# Altium PCB BopIT.PcbDoc
Units mil, origin at the board's own origin, x right, y up, seen from the top; angles counter-clockwise.
Board outline 3149.61 x 2992.13 mil, 2 copper layers (Top Layer, Bottom Layer); 13 components, 19 nets, 53 pads, 39 vias.
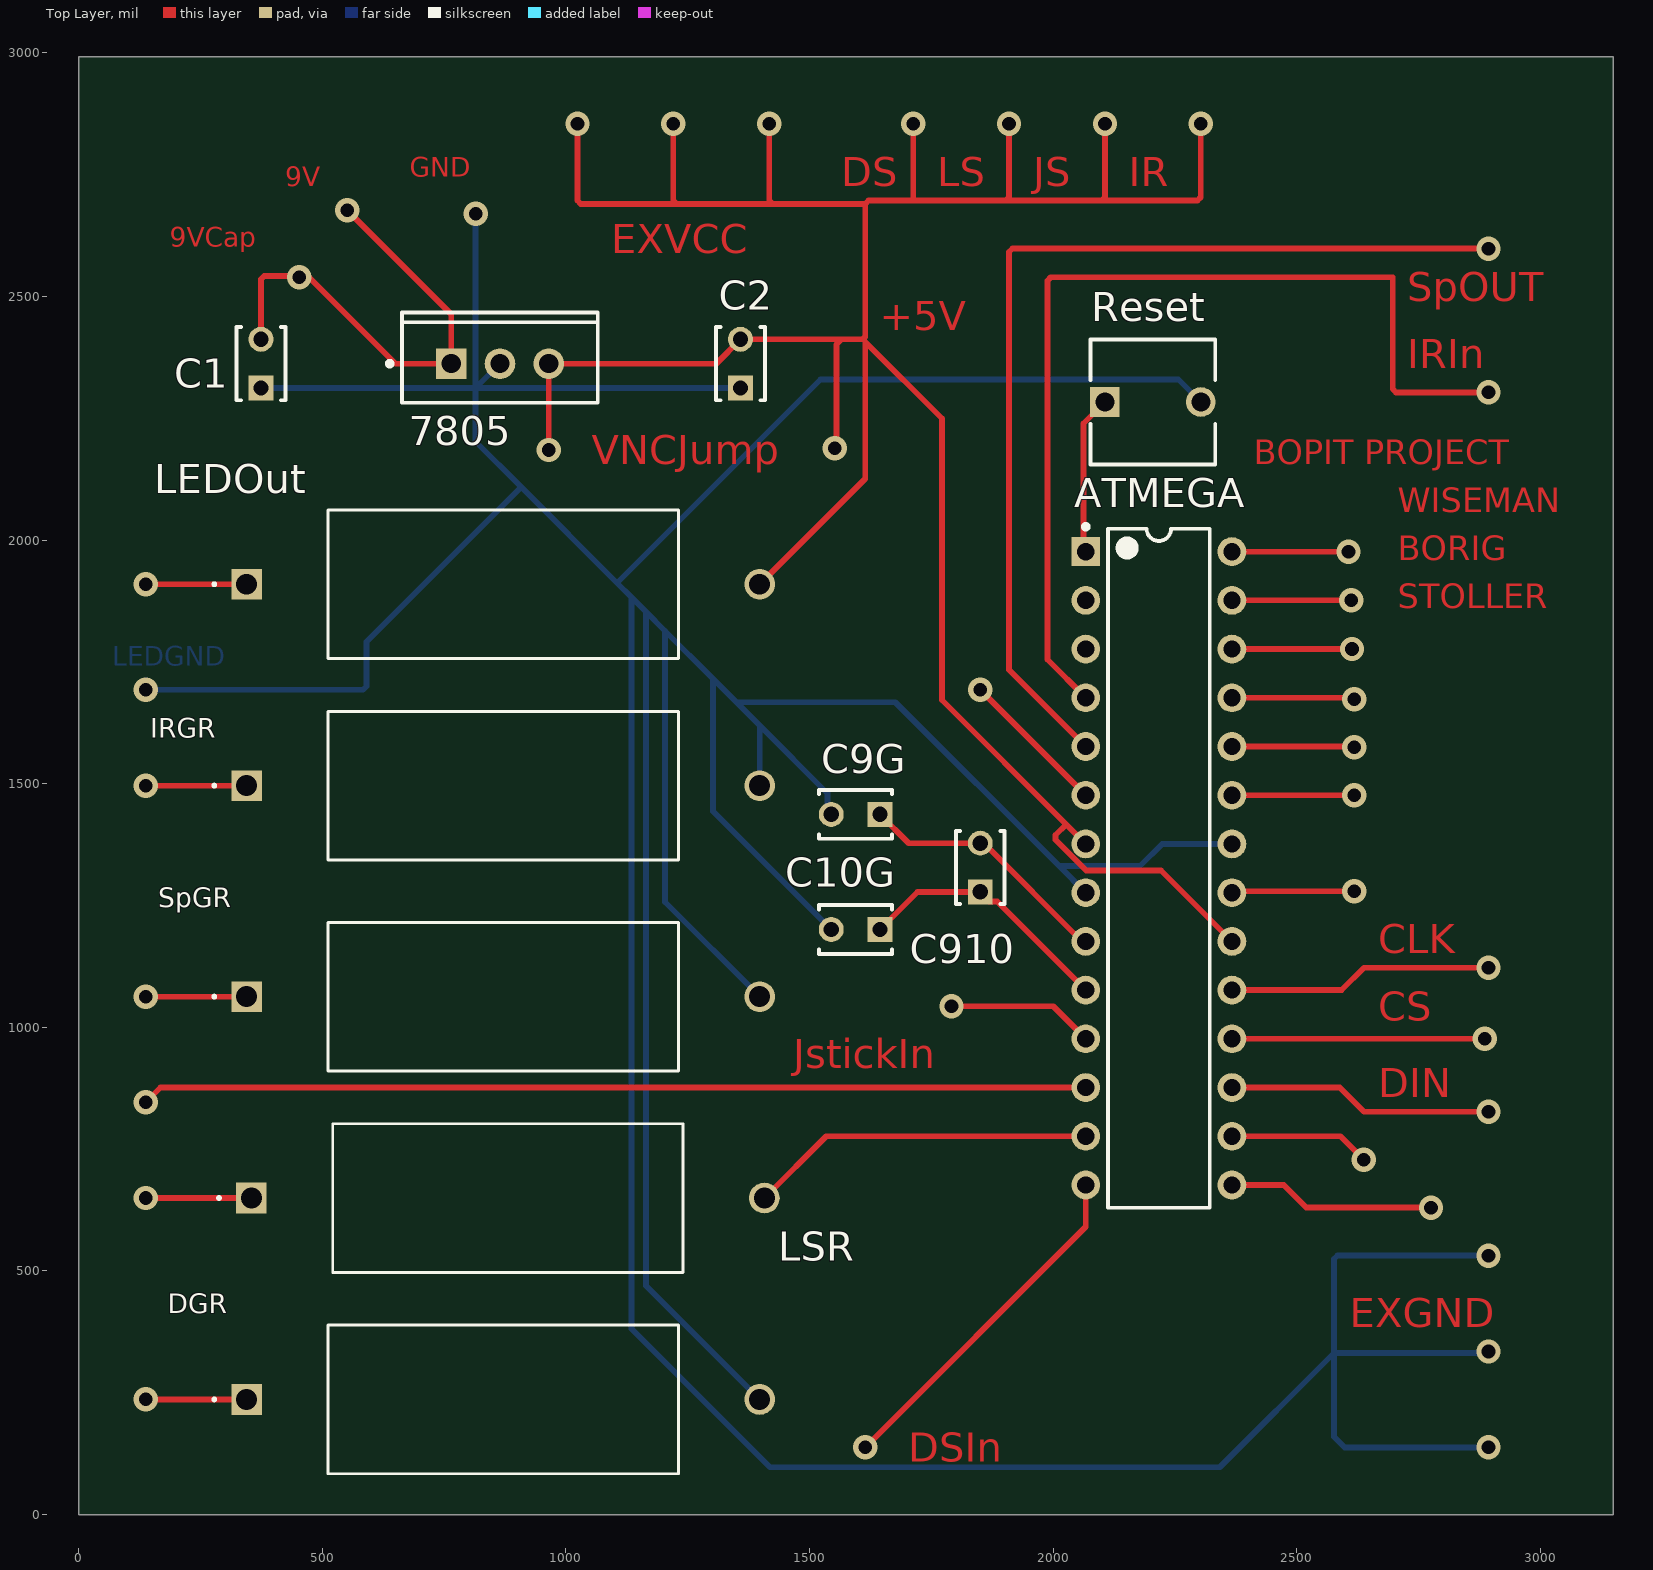
[diagram p0: Top Layer view]
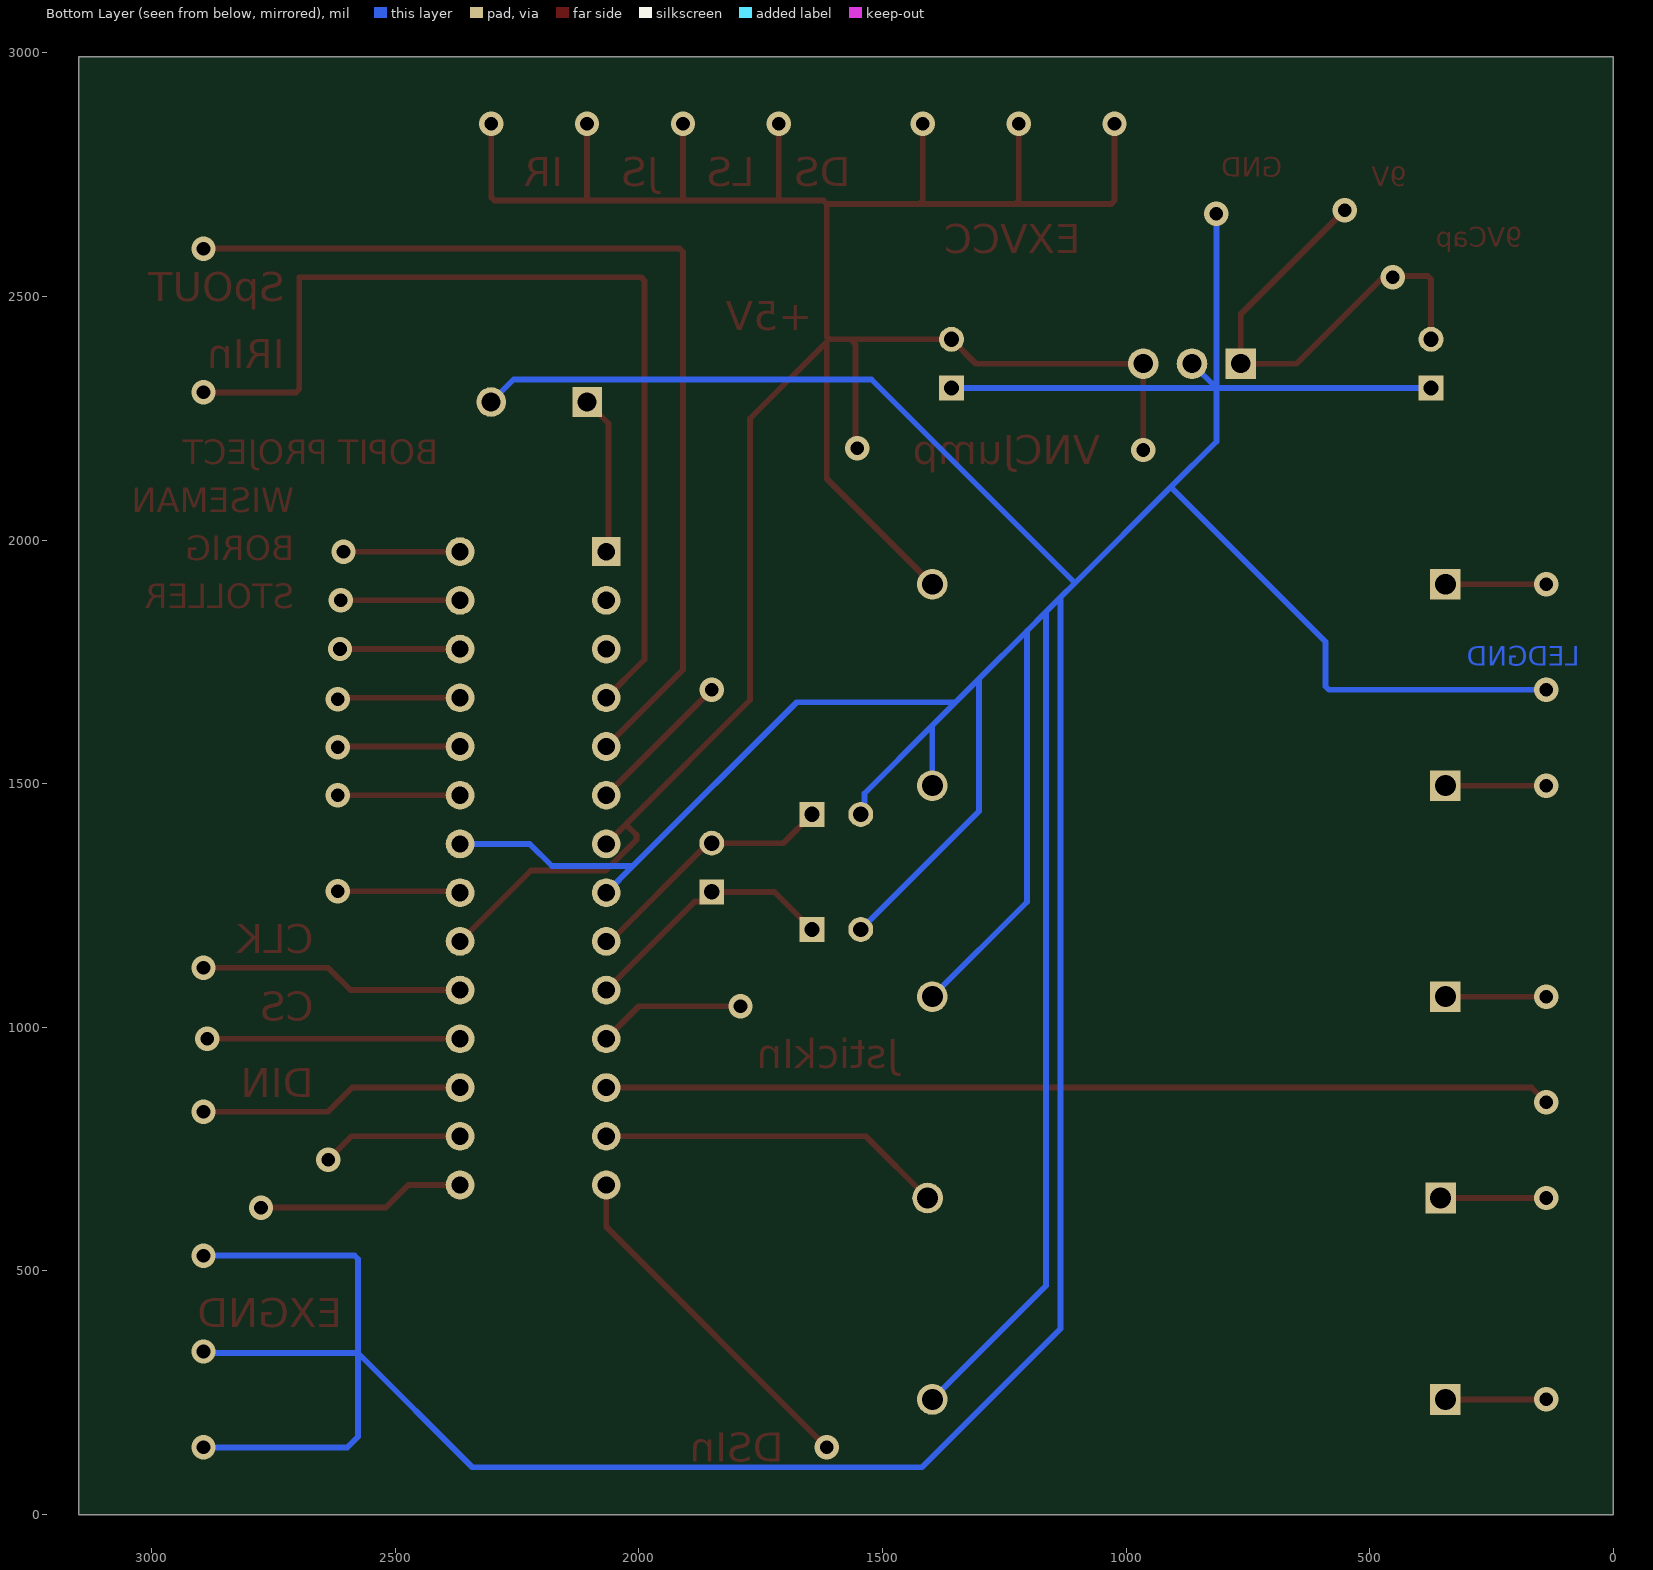
[diagram p1: Bottom Layer view, seen from below]

## Layer stack, top to bottom
Top Solder: solder mask 0.4, Solder Resist, Dk 3.5
Top Layer: signal copper 1.4
Dielectric 1: dielectric 12.6, FR-4, Dk 4.8
Bottom Layer: signal copper 1.4
Bottom Solder: solder mask 0.4, Solder Resist, Dk 3.5

## Board outline
0,0 3149.61,0 3149.61,2992.13 0,2992.13

## Design rules (kind name [scope] priority, off if disabled: settings)
Clearance [All] p1: gap=10 ignorepadtopadclearanceinfootprint=FALSE except(0: Arc-Hole Track-Hole SMDPad-Hole THPad-Hole Via-Hole Fill-Hole Poly-Hole Region-Hole Text-Hole)
PolygonConnect [All] p1: connectstyle=Relief reliefconductorwidth=10 reliefentries=4 polygonreliefangle="90 Angle" airgapwidth=10
RoutingVias [All] p1: holewidth=28 width=50 viastyle="Through Hole" minholewidth=28 minwidth=50 maxholewidth=28 maxwidth=50
SolderMaskExpansion [All] p1: expansion=4 istentingtop=FALSE
Width [All] p1: maxlimit=19.68 minlimit=10 preferedwidth=15.75
30 further rules are at their usual default settings.

## Components (designator, comment, footprint, x,y, rotation, side; value= is the part's Value field where it differs from the comment)
7805 "LM7805ACT" FAIR-TO-220-3 864.57,2362.2 r90 top
ATMEGA "ATmega328-PU" 28P3 2216.93,1326.38 r0 top
C1 "10uF" KEMT-C315-THT-2 374.02,2362.2 r90 top
C2 "1uF" KEMT-C315-THT-2 1358.27,2362.2 r90 top
C9G "1uF" KEMT-C315-THT-2 1594.49,1437.01 r180 top
C10G "1uF" KEMT-C315-THT-2 1594.49,1200.79 r180 top
C910 "C315C100J2G5TA" KEMT-C315-THT-2 1850.39,1327.95 r90 top
DGR "AC05000001001JAC00" RES_AC05_VIS 344.64,236.22 r0 top
IRGR "AC05000001001JAC00" RES_AC05_VIS 344.64,1496.06 r0 top
LEDOut "AC05000001001JAC00" RES_AC05_VIS 344.64,1909.45 r0 top (schematic designator LEDOR)
LSR "AC05000001001JAC00" RES_AC05_VIS 354.33,649.61 r0 top (schematic designator LIR)
Reset "FSM4JRT" FP-FSM4JRT-MFG 2204.72,2283.46 r0 top
SpGR "AC05000001001JAC00" RES_AC05_VIS 344.64,1062.99 r0 top

## Footprints (in the part's own frame and the unit in brackets; to place one, negate y for a bottom-side part, rotate by r counter-clockwise, add the part's x,y. Pads: shape width x height; smd on the part's side, far side on the other; paste and mask are expansions set on the pad)
28P3 [mm] "28-Pin Plastic Dual In-Line Package (PDIP)"
  rect 1.5x1.5 hole 0.9: 1(-3.81,16.51)
  round 1.5 hole 0.9: 2(-3.81,13.97) 3(-3.81,11.43) 4(-3.81,8.89) 5(-3.81,6.35) 6(-3.81,3.81) 7(-3.81,1.27) 8(-3.81,-1.27) 9(-3.81,-3.81) 10(-3.81,-6.35) 11(-3.81,-8.89) 12(-3.81,-11.43) 13(-3.81,-13.97) 14(-3.81,-16.51) 15(3.81,-16.51) 16(3.81,-13.97) 17(3.81,-11.43) 18(3.81,-8.89) 19(3.81,-6.35) 20(3.81,-3.81) 21(3.81,-1.27) 22(3.81,1.27) 23(3.81,3.81) 24(3.81,6.35) 25(3.81,8.89) 26(3.81,11.43) 27(3.81,13.97) 28(3.81,16.51)
  silkscreen extent -3.93,-17.7 2.65,17.93, body extent -3.6,-17.65 3.6,17.65, height 4.58
FAIR-TO-220-3 [mm] "FM, 3-Leads, Body 10.2x4.7mm, Pitch 2.54mm"
  rect 1.6x1.6 hole 1: 1(0,2.54)
  round 1.6 hole 1: 2(0,0) 3(0,-2.54)
  silkscreen extent -2.04,-5.1 2.66,5.87, body extent -2.04,-5.1 2.66,5.1, height 18.95
FP-FSM4JRT-MFG [mil]
  rect 60.65x60.65 hole 39 paste-39370.1 mask+0: 1(-98.5,0)
  round 60.65 hole 39 paste-39370.1 mask+0: 2(98.5,0)
  silkscreen extent -128,-128 128,128, body extent -133,-132 133,132, height 10
KEMT-C315-THT-2 [mm] "THD, 2-Leads, Body 3.81x2.54mm"
  rect 1.3x1.3 hole 0.8: 1(-1.27,0)
  round 1.3 hole 0.8: 2(1.27,0)
  silkscreen extent -1.91,-1.27 1.91,1.27, body extent -1.91,-1.27 1.91,1.27, height 4.66
RES_AC05_VIS [mil]
  rect 63x63 / inner round 60 / far side rect 63x63 hole 43 paste-31.5 mask+0: 1(0,0)
  round 63 / inner round 60 / far side round 63 hole 43 paste-31.5 mask+0: 2(1053,0)
  silkscreen extent -69,-152 886,152, body extent -16,-147 1069,147, height 295

## Part data
7805: library part CMP-2000-04937-1, "Positive Voltage Regulator, 5 V, 1 A, 0 to 125 degC, 3-Pin TO-220, RoHS, Tube", Dropout Voltage Measurement Current=1A, Manufacturer=Fairchild, Maximum Input Voltage=35V, Maximum Operating Temperature=+125degC, Minimum Operating Temperature=0degC, Output Voltage=5V, Package Description="3-Pin Through Hole Device, Body 10 x 4.5 mm, Pitch 2.54 mm", Package Reference=TO-220, Quiescent Current=6mA, Typical Dropout Voltage @ Current=2V@1A, Datasheet URL=https://datasheet.ciiva.com/5816/1359194-5816420.pdf, Datasheet Version="Rev. 1.0.1, 05/2006", Dimensions=10.67x4.83x16.51mm, Height=16.51mm, Length=10.67mm, Line Regulation=50mV, Load Regulation=100mV, Manufacturer URL=https://www.fairchildsemi.com/, Maximum Output Current=1A, Mounting Type=ThroughHole, Number of Outputs=1, Output Type=Fixed, Package Type=TO-220, Package URL=https://www.fairchildsemi.com/package-drawings/TO/TO220B03.pdf, Pin Count=3, Polarity=Positive, Regulator Function=Linear, Series=LM78xx, Width=4.83mm
ATMEGA: library part CMP-0095-00015-2, "8-bit AVR Microcontroller, 32KB Flash, 1KB EEPROM, 2KB SRAM, 28-pin PDIP, Industrial Grade (-40°C to 85°C)", ComponentLink1Description="Manufacturer URL", ComponentLink1URL=http://www.atmel.com/, ComponentLink2Description="ATmega48A/48PA/88A/88PA/168A/168PA/328/328P Datasheet", ComponentLink2URL=http://www.atmel.com/dyn/resources/prod_documents/8271.pdf, ComponentLink3Description="ATmega48A/48PA/88A/88PA/168A/168PA/328/328P Summary", ComponentLink3URL=http://www.atmel.com/dyn/resources/prod_documents/8271S.pdf, DatasheetVersion="revD, May-2011", PackageDescription="28-lead (0.300\"/7.62mm Wide) Plastic Dual Inline Package (PDIP)", PackageReference=28P3, PackageVersion="revB, Sep-2001", RevisionNote="DatasheetVersion updated. URLs added."
C1 C2 C9G C10G C910: library part CMP-1664-00009-1, "Capacitor, Ceramic, 10 pF, +/-5 %, 200 V, 2-Pin THD, RoHS, Bulk", Case\Package=DIP, Max Dual Supply Voltage="16 V", Max Operating Temperature="70 degC", Min Dual Supply Voltage="1.5 V", Min Operating Temperature="0 degC", Nominal Supply Current="1.2 mA", Nominal Supply Voltage="5 V", Nominal Voltage Gain="100 dB", Output Current="30 mA", Package Quantity=50, Bandwidth="700 KHz", Channels=2, Common Mode Rejection Ratio="65 dB", ComponentLink1Description="Manufacturer URL", ComponentLink1URL=http://www.kemet.com/, ComponentLink2Description=Datasheet, ComponentLink2URL=http://capacitoredge.kemet.com/capedge2/DataSheet/Datasheet-C315C100J2G5TA.pdf?pn=C315C100J2G5TA{BULK}, DatasheetVersion=Aug-16, Max Supply Voltage="16 V", Min Supply Voltage="1.5 V", Mount="Through Hole", Nominal Gain Bandwith Product="700 KHz", PackageDescription="2-Pin Through Hole Device, Body 3.81 x 2.54 mm", PackageReference=C315-THT-2, Packaging=Rail/Tube, Pins=8, Radiation Hardening=No, REACH SVHC="No SVHC", RoHSCompliant=true, Slew Rate="0.3 V\us", Unity Gain Bandwidth Product="700 KHz"
DGR IRGR LEDOut LSR SpGR: library part CMP-00030-39746222-1, "AC05000001001JAC00 Resistor, Wirewound, Res 1 Kilohms, Pwr-Rtg 5 W, Tol 5%, Axial, Ceramic Core", Case/Package=Conformal, Max Operating Temperature=275°C, Max Power Dissipation=5W, Min Operating Temperature=0°C, Resistance=1kΩ, Temperature Coefficient=180ppm/°C, Tolerance=5%, Voltage Rating=71V, Composition=Wirewound, Contact Plating=Tin, Diameter=7.5mm, Features="Flame Retardant Coating", Lead Diameter=800µm, Lead Free="Lead Free", Length=18mm, Military Standard=Not, Mount="Through Hole", NexarPartId=39746222, Number of Pins=2, Number of Terminations=2, Packaging="Tape & Box (TB)", Power Rating=5W, Radiation Hardening=No, REACH SVHC=Unknown, RoHS=Compliant, Schedule B="8533210080, 8533210080", Termination=Axial, Voltage Rating (DC)=71V, Width=7.49mm
Reset: library part CMP-03407-000038-1, "SWITCH TACTILE SPST-NO 0.05A 24V", Case/Package=Radial, Contact Current Rating=50mA, Contact Resistance=100mR, Max Operating Temperature=105°C, Max Voltage Rating (DC)=12V, Min Operating Temperature=-35°C, Operating Force=1.57N, Package Quantity=10000, Actuator Diameter=3.5mm, Actuator Length=0.055inch, Actuator Material=Resin, Actuator Type=Standard, Contact Material="Copper Alloy", Contact Plating=Silver, Current Rating=50mA, Depth=6.19mm, Electrical Life=100000Cycles, Illumination Type=Non-Illuminated, Length=6.19mm, Max Current Rating=50mA, Mechanical Life=100000Cycles, Mount="Through Hole", Orientation=Straight, Packaging="Tape and Reel", Radiation Hardening=No, RoHS Compliant=Yes, Series=FSMJRT, Switch Function=Off-Mom, Switch Travel=0.25mm, Termination="PC Pins", Throw Configuration=SPST, Type=Switch, Voltage Rating (DC)=12V

## Via types
v1: diameter 50, hole 28, Top Layer to Bottom Layer, 39 vias

## Nets (pads, with @x,y where several pads share a name; then routed paths per layer and width w, separated by ;. In a path a pad name is that pad's centre, name@x,y a point inside that pad or via, vN(x,y) a via of type N, cw(c..) or ccw(c..) an arc to the next point about the centre after c; other vN are vias at no path point)
GND: 7805.2 ATMEGA.8 ATMEGA.22 C1.1 C2.1 C9G.2 C10G.2 DGR.2 IRGR.2 Reset.2 SpGR.2 | length 14010.5
  Top Layer w11.81: ATMEGA.22 ATMEGA.22@2368.5,1377.95
  Bottom Layer w11.81: v1@137.8,1712.6 157.48,1692.91 583.63,1692.91 590.55,1699.83 590.55,1791.34 908.19,2108.97 ; C1.1 814.57,2312.2 ; v1(814.57,2669.68) 814.57,2312.2 ; 7805.2 814.57,2312.2 ; C2.1 814.57,2312.2 ; DGR.2 1164.09,469.77 1164.09,1853.07 ; SpGR.2 1203.46,1257.17 1203.46,1813.7 ; IRGR.2 1397.64,1619.52 ; C10G.2 1301.89,1443.39 1301.89,1715.27 ; C9G.2 1536.96,1444.54 1536.96,1480.21 1397.64,1619.52 ; ATMEGA.8 2012.36,1330.94 ; Reset.2 2256.99,2329.7 1522.61,2329.7 1105.04,1912.12 ; ATMEGA.22 2223.84,1376.38 2178.41,1330.94 2012.36,1330.94 ; v1(2893.7,137.8) 2598.43,137.8 2576.61,159.61 2576.61,331.72 ; v1(2893.7,334.65) 2890.77,331.72 2576.61,331.72 ; v1(2893.7,531.5) 2583.53,531.5 2576.61,524.58 2576.61,331.72 ; 814.57,2312.2 814.57,2202.6 908.19,2108.97 ; 908.19,2108.97 1105.04,1912.12 ; 1105.04,1912.12 1134.57,1882.6 ; 1134.57,1882.6 1164.09,1853.07 ; 1134.57,1882.6 1134.57,381.18 1418.86,96.89 2341.79,96.89 2576.61,331.72 ; 1164.09,1853.07 1203.46,1813.7 ; 1203.46,1813.7 1301.89,1715.27 ; 1301.89,1715.27 1349.76,1667.4 ; 1349.76,1667.4 1397.64,1619.52 ; 1349.76,1667.4 1675.91,1667.4 2012.36,1330.94
  other v1: 137.8,1692.91
Net7805_3: 7805.3 ATMEGA.7 ATMEGA.20 C2.2 LEDOut.2 | length 6059.2
  Top Layer w11.81: v1(964.57,2185.04) 7805.3 1308.27,2362.2 C2.2 1565.75,2412.2 ; v1(1023.62,2854.33) 1023.62,2696.93 1030.54,2690.01 1227.39,2690.01 ; v1(1220.47,2854.33) 1220.47,2696.93 1227.39,2690.01 ; LEDOut.2 1614.17,2125.98 1614.17,2406.89 1771.65,2249.41 1771.65,1671.65 2026.77,1416.54 ; v1(1417.32,2854.33) 1417.32,2696.93 1424.24,2690.01 ; v1@1548.2,2185.04 v1(1551.66,2188.5) 1555.12,2191.96 1555.12,2401.57 1565.75,2412.2 ; v1(1712.6,2854.33) 1712.6,2696.93 ; v1(1909.45,2854.33) 1909.45,2703.85 1902.53,2696.93 ; ATMEGA.7 2026.77,1416.54 ; v1(2106.3,2854.33) 2106.3,2703.85 2099.38,2696.93 ; v1(2303.15,2854.33) 2303.15,2703.85 2296.23,2696.93 2099.38,2696.93 ; ATMEGA.20 2221.5,1321.81 2067.95,1321.81 2004.89,1384.87 2004.89,1394.66 2026.77,1416.54 ; 1227.39,2690.01 1424.24,2690.01 ; 1424.24,2690.01 1614.17,2690.01 ; 1565.75,2412.2 1608.86,2412.2 1614.17,2417.52 1614.17,2690.01 ; 1614.17,2690.01 1621.09,2696.93 1712.6,2696.93 ; 1712.6,2696.93 1902.53,2696.93 ; 1902.53,2696.93 2099.38,2696.93
NetATMEGA_1: ATMEGA.1 Reset.1 | length 325.3
  Top Layer w11.81: ATMEGA.1@2062.2,1976.38 2062.2,2239.44 Reset.1
NetATMEGA_4: ATMEGA.4 | length 2029.2
  Top Layer w11.81: ATMEGA.4 1988.19,1755.12 1988.19,2532.45 1995.11,2539.37 2696.85,2539.37 2696.85,2310.07 2703.77,2303.15 v1(2893.7,2303.15)
NetATMEGA_5: ATMEGA.5 | length 2067.5
  Top Layer w11.81: ATMEGA.5 1909.45,1733.86 1909.45,2591.51 1916.37,2598.43 v1(2893.7,2598.43)
NetATMEGA_9: ATMEGA.9 C9G.1 C910.2 | length 530.4
  Top Layer w11.81: C9G.1 1703.54,1377.95 C910.2 1857.87,1377.95 2059.45,1176.38 ATMEGA.9
NetATMEGA_10: ATMEGA.10 C10G.1 C910.1 | length 537.9
  Top Layer w11.81: C10G.1 1721.65,1277.95 C910.1 1870.08,1258.27 1885.04,1258.27 ATMEGA.10
NetATMEGA_12: ATMEGA.12 | length 1941.5
  Top Layer w11.81: v1(137.8,846.46) 167.72,876.38 ATMEGA.12
NetATMEGA_13: ATMEGA.13 LSR.2 | length 721.8
  Top Layer w11.81: LSR.2@1397.64,649.61 LSR.2 1534.1,776.38 ATMEGA.13
NetATMEGA_14: ATMEGA.14 | length 726.1
  Top Layer w11.81: v1(1614.17,137.8) 2066.93,590.55 ATMEGA.14
NetATMEGA_17: ATMEGA.17 | length 547.3
  Top Layer w11.81: ATMEGA.17 2588.19,876.38 2637.8,826.77 v1(2893.7,826.77)
NetATMEGA_18: ATMEGA.18 | length 518.9
  Top Layer w11.81: ATMEGA.18 v1(2885.83,976.38)
NetATMEGA_19: ATMEGA.19 | length 545.7
  Top Layer w11.81: ATMEGA.19 2592.13,1076.38 2637.8,1122.05 v1(2893.7,1122.05)
NetDGR_1: DGR.1 | length 206.8
  Top Layer w11.81: v1(137.8,236.22) DGR.1
NetIRGR_1: IRGR.1 | length 206.8
  Top Layer w11.81: v1(137.8,1496.06) IRGR.1
NetLEDOR_1: LEDOut.1 | length 206.8
  Top Layer w11.81: v1(137.8,1909.45) LEDOut.1
NetLIR_1: LSR.1 | length 216.5
  Top Layer w11.81: v1(137.8,649.61) LSR.1
NetSpGR_1: SpGR.1 | length 206.8
  Top Layer w11.81: v1(137.8,1062.99) SpGR.1
VCC: 7805.1 C1.2 | length 998.8
  Top Layer w11.81: C1.2 374.02,2535.43 380.93,2542.35 v1@449.77,2542.35 ; v1(452.76,2539.37) v1@449.77,2542.35 ; v1(551.18,2677.17) 764.57,2463.78 7805.1 650.03,2362.2 469.88,2542.35 v1@449.77,2542.35
pads on no net: ATMEGA.2 ATMEGA.3 ATMEGA.6 ATMEGA.11 ATMEGA.15 ATMEGA.16 ATMEGA.21 ATMEGA.23 ATMEGA.24 ATMEGA.25 ATMEGA.26 ATMEGA.27 ATMEGA.28
copper on no net: | length 3099.2
  Top Layer w11.81: v1(1791.34,1043.31) 2000,1043.31 2066.93,976.38 ; v1(1850.39,1692.91) 2066.93,1476.38 ; 2366.93,676.38 2473.23,676.38 2519.68,629.92 v1(2775.59,629.92) ; 2366.93,776.38 2589.76,776.38 v1(2637.8,728.35) ; 2366.93,1276.38 2370.08,1279.53 v1(2618.11,1279.53) ; 2366.93,1476.38 v1(2618.11,1476.38) ; 2366.93,1576.38 2616.54,1576.38 v1(2618.11,1574.8) ; 2366.93,1676.38 2614.96,1676.38 v1(2618.11,1673.23) ; 2366.93,1776.38 v1(2613.39,1776.38) v1@2618.11,1771.65 ; 2366.93,1876.38 v1(2611.81,1876.38) v1@2618.11,1870.08 ; 2366.93,1976.38 v1(2606.3,1976.38) v1@2618.11,1988.19

## Other copper
Top Layer:
  text "GND" at 679.29,2746.22 h40
  text "9V" at 423.39,2726.54 h40
  text "DS" at 1565.12,2726.54 h60
  text "LS" at 1761.97,2726.54 h60
  text "JS" at 1958.82,2726.54 h60
  text "IR" at 2155.67,2726.54 h60
  text "9VCap" at 187.17,2602.07 h40
  text "EXVCC" at 1092.68,2588.74 h60
  text "SpOUT" at 2726.54,2490.62 h60
  text "+5V" at 1643.86,2431.26 h60
  text "IRIn" at 2726.54,2352.52 h60
  text "VNCJump" at 1053.31,2155.98 h60
  text "BOPIT PROJECT" at 2411.57,2155.67 h50
  text "WISEMAN" at 2706.85,2057.24 h50
  text "BORIG" at 2706.85,1958.82 h50
  text "STOLLER" at 2706.85,1860.39 h50
  text "CLK" at 2667.48,1151.73 h60
  text "CS" at 2667.48,1013.94 h60
  text "JstickIn" at 1466.69,915.51 h60
  text "DIN" at 2667.48,856.46 h60
  text "EXGND" at 2608.43,384.02 h60
  text "DSIn" at 1702.91,108.43 h60
Bottom Layer:
  text "LEDGND" at 69.06,1742.28 h40

## Silkscreen, mask and mechanical layers (free items; w line width, h text height)
Mechanical 1:
  lines w10: 0,0 19.68,0 39.37,0 3149.61,0 3149.61,2992.13 0,2992.13 0,0